# Altium PCB UWB-Adapter_Pcb.PcbDoc
Units mil, origin at the board's own origin, x right, y up, seen from the top; angles counter-clockwise.
Board outline 708.66 x 1771.65 mil, 2 copper layers (Top Layer, Bottom Layer), stack 49.606 mil thick; 46 components, 63 nets, 223 pads, 83 vias.
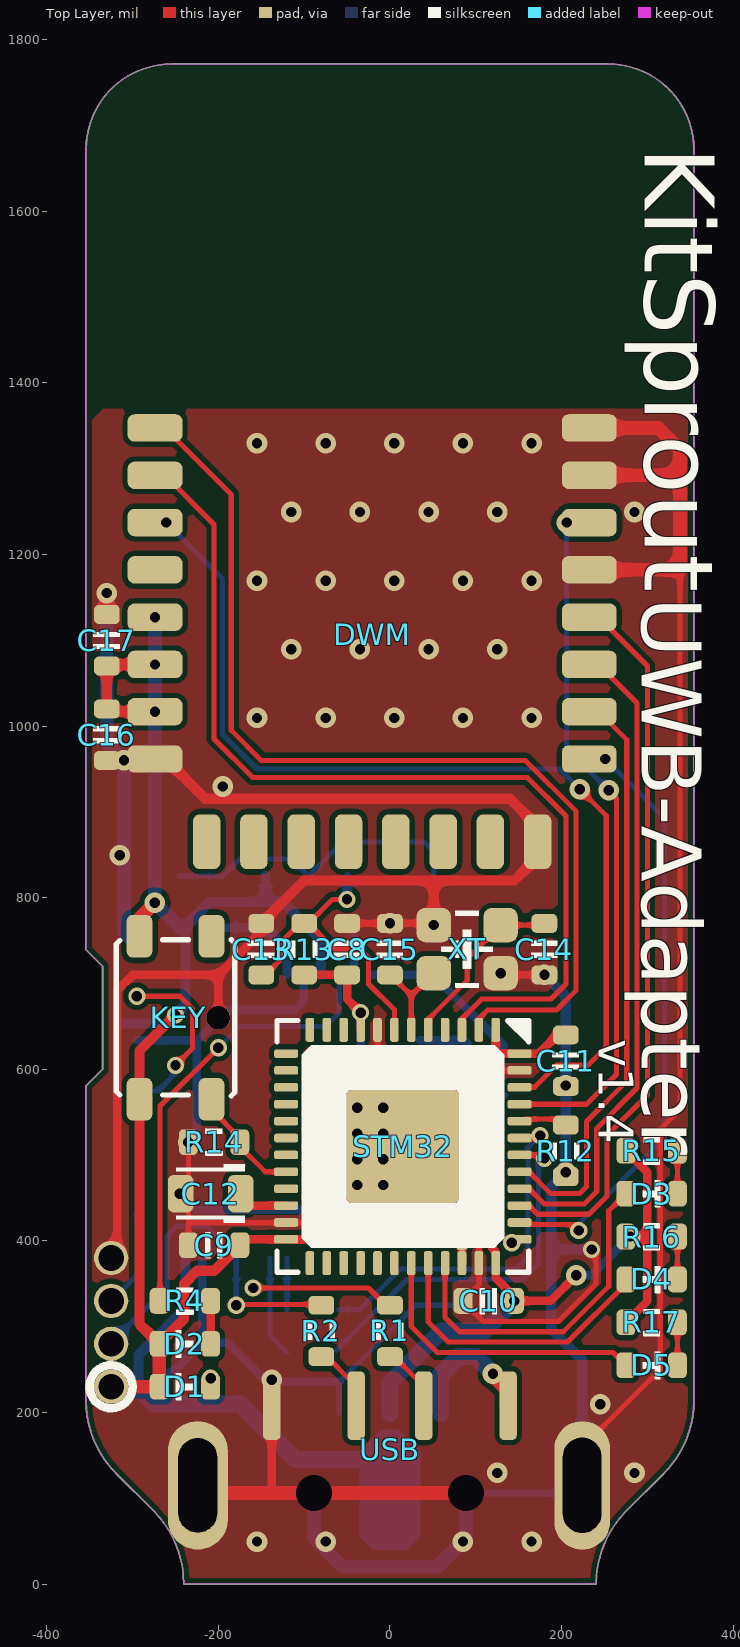
[diagram p0: Top Layer view]
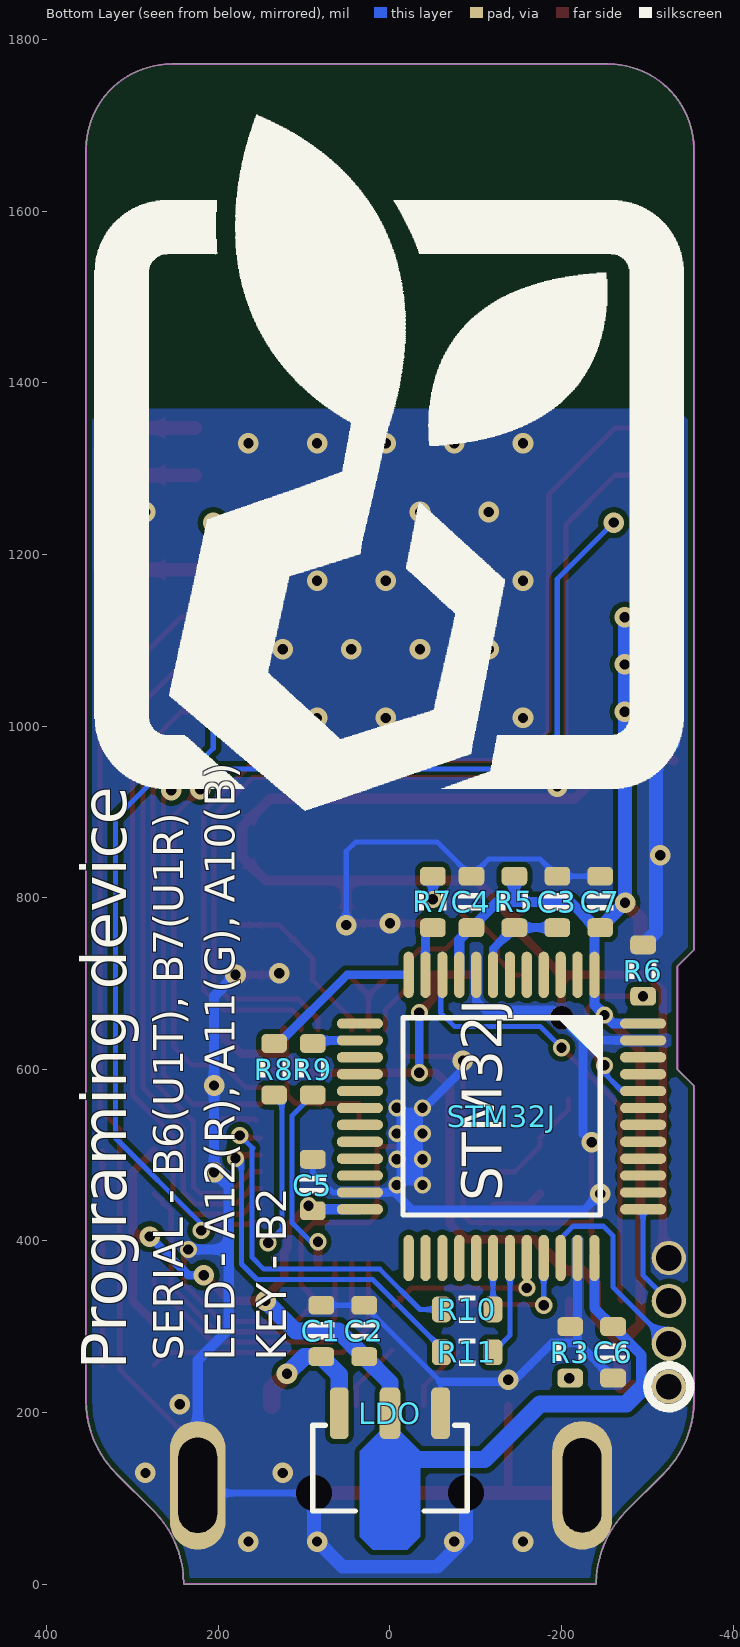
[diagram p1: Bottom Layer view, seen from below]
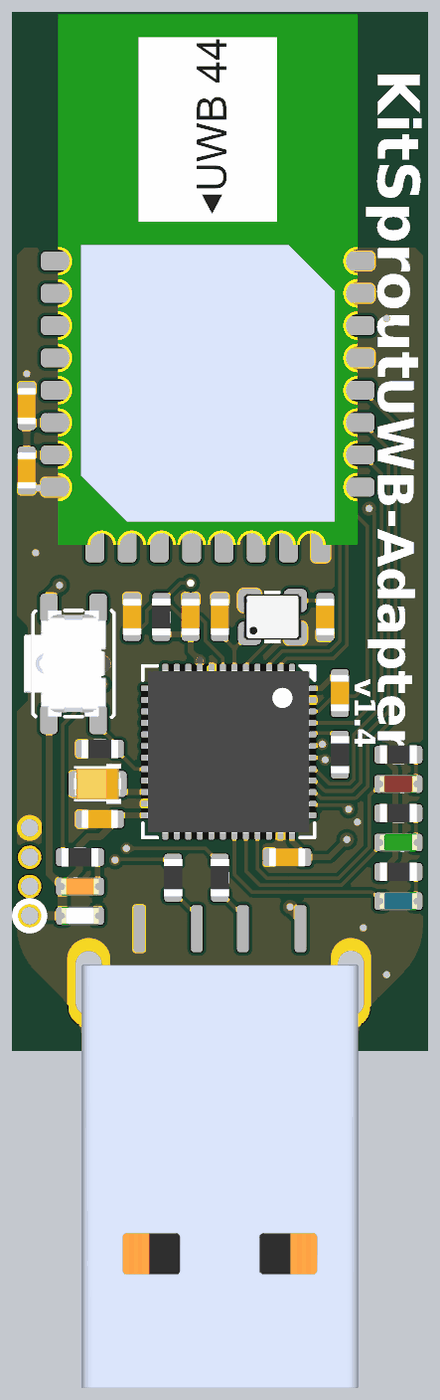
[diagram p2: 3D render of the assembled board from above, using the file's embedded part models]
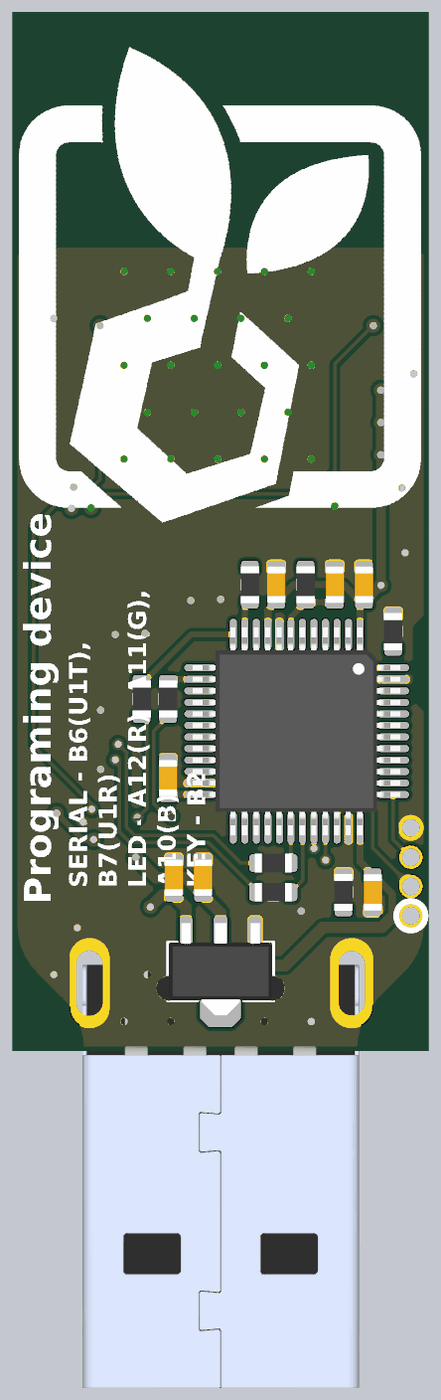
[diagram p3: 3D render of the assembled board from below, using the file's embedded part models]

## Layer stack, top to bottom
Top Solder: solder mask 0.3937, Solder Resist, Dk 3.5
Top Layer: signal copper 1.1811
Dielectric 1: core 47.2441, Dk 4.2
Bottom Layer: signal copper 1.1811
Bottom Solder: solder mask 0.3937, Solder Resist, Dk 3.5

## Board outline
-354.33,214.02 -354.33,580.67 -335,600 -335,720 -354.33,739.33 -354.33,1671.65 cw(c-254.33,1671.65) -254.33,1771.65 254.33,1771.65 cw(c254.33,1671.65) 354.33,1671.65 354.33,214.02 cw(c233.62,214.02) 318.98,128.66 275.67,85.36 ccw(c361.03,0) 240.31,0 -240.31,0 ccw(c-361.03,0) -275.67,85.36 -318.98,128.66 cw(c-233.62,214.02)

## Design rules (kind name [scope] priority, off if disabled: settings)
Clearance "Stitching GND" [IsStitchingVia and InNet('GND') vs (IsVia and (Not IsStitchingVia)) Or IsPad] p1: gap=6
Clearance ClearancePolygon [InPolygon] p2: gap=6
Clearance [All] p3: gap=6
ComponentClearance [All] p1: gap=0 collisioncheckmode=3 verticalgap=0 showdistances=FALSE
Height [All] p1: minheight=0 maxheight=5000 prefheight=500
HoleSize [All] p1: absolutevalues=TRUE maxlimit=200 minlimit=1 maxpercent=80.000 minpercent=20.000
HoleToHoleClearance [All] p1: gap=6 allowstackedmicrovias=TRUE
MinimumSolderMaskSliver [All] p1: minsoldermaskwidth=0
PolygonConnect [All] p1: connectstyle=Direct reliefconductorwidth=10 reliefentries=4 polygonreliefangle="90 Angle" airgapwidth=10
RoutingVias [All] p1: holewidth=12 width=24 viastyle="Through Hole" minholewidth=12 minwidth=16 maxholewidth=28 maxwidth=50
SilkToSilkClearance [All] p1: silktosilkclearance=0
SilkToSolderMaskClearance [IsPad] p1: minsilkscreentomaskgap=0 clearancetoexposedcopper=TRUE
SolderMaskExpansion [All] p1: expansion=2
Width [All] p1: maxlimit=50 minlimit=6 preferedwidth=10
23 further rules are at their usual default settings.

## Components (designator, comment, footprint, x,y, rotation, side; value= is the part's Value field where it differs from the comment)
C1 "Cap_0603" CAP_0603 80,295 r270 bottom
C2 "Cap_0603" CAP_0603 30,295 r270 bottom
C3 "Cap_0603" CAP_0603 -195,795 r270 bottom
C4 "Cap_0603" CAP_0603 -95,795 r270 bottom
C5 "Cap_0603" CAP_0603 90,465 r270 bottom
C6 "Cap_0603" CAP_0603 -260,270 r90 bottom
C7 "Cap_0603" CAP_0603 -245,795 r270 bottom
C8 "Cap_0603" CAP_0603 -50,740 r270 top
C9 "Cap_0603" CAP_0603 -205,395 r0 top
C10 "Cap_0603" CAP_0603 115,330 r0 top
C11 "Cap_0603" CAP_0603 205,610 r90 top
C12 "Cap_Tan_0805" CAP_TAN_P0805 -209,455 r180 top
C13 "Cap_0603" CAP_0603 -150,740 r270 top
C14 "Cap_0603" CAP_0603 180,740 r90 top
C15 "Cap_0603" CAP_0603 0,740 r270 top
C16 "Cap_0603" CAP_0603 -330,990 r270 top
C17 "Cap_0603" CAP_0603 -330,1100 r90 top
D1 "LED_0603" LED_0603_YELLOW -239,230 r0 top
D2 "LED_0603" LED_0603_ORANGE -239,280 r0 top
D3 "LED_0603" LED_0603_RED 305,455 r180 top
D4 "LED_0603" LED_0603_GREEN 305,355 r180 top
D5 "LED_0603" LED_0603_BLUE 305,255 r180 top
DWM "DWM1000" DWM1000 -20.75,863.15 r0 top locked
KEY "ButtonTACT" ButtonTACT_3.5*3.55_90 -250,660 r90 top locked
LDO "AMS1117" SOT89-3 0,135 r270 bottom
R1 "Res_0603" RES_0603 0,295 r90 top
R2 "Res_0603" RES_0603 -80,295 r90 top
R3 "Res_0603" RES_0603 -210,270 r270 bottom
R4 "Res_0603" RES_0603 -239,330 r0 top
R5 "Res_0603" RES_0603 -145,795 r90 bottom
R6 "Res_0603" RES_0603 -295,715 r270 bottom
R7 "Res_0603" RES_0603 -50,795 r270 bottom
R8 "Res_0603" RES_0603 135,600 r90 bottom
R9 "Res_0603" RES_0603 90,600 r90 bottom
R10 "Res_0603" RES_0603 -90,320 r180 bottom
R11 "Res_0603" RES_0603 -90,270 r180 bottom
R12 "Res_0603" RES_0603 205,505 r270 top
R13 "Res_0603" RES_0603 -100,740 r270 top
R14 "Res_0603" RES_0603 -205,515 r0 top
R15 "Res_0603" RES_0603 305,505 r180 top
R16 "Res_0603" RES_0603 305,405 r180 top
R17 "Res_0603" RES_0603 305,305 r180 top
STM32 "STM32F411C" QFN_P0.5_48 15,510 r270 top locked
STM32J "STM32F072C" LQFP_P0.5_48 -130,545 r270 bottom locked
USB "USB_Plug_TypeA" USB_Plug_TypeA 0,0 r270 top
XT "XTAL_2520_4P" XT_2520_4 90,740 r0 top

## Footprints (in the part's own frame and the unit in brackets; to place one, negate y for a bottom-side part, rotate by r counter-clockwise, add the part's x,y. Pads: shape width x height; smd on the part's side, far side on the other; paste and mask are expansions set on the pad)
ButtonTACT_3.5*3.55_90 [mil]
  round 27.56 hole 27.56 mask+0: 0(-0.01,-50)
  rrect50% 50x30 smd: 1(-95,42) 2(-95,-42) 3(95,42) 4(95,-42)
  silkscreen extent -91,-69 91,69, body extent -90,-55 91,85, height 56
CAP_0603 [mil]
  rrect50% 22x30 smd: 1(-30,0) 2(30,0)
  silkscreen extent -10,-15 10,15, body extent -31,-16 31,16, height 31
CAP_TAN_P0805 [mil]
  rrect50% 30x44 smd: 1(-35,0) 2(35,0)
  silkscreen extent -40,-34 40,34, body extent -40,-27 40,27, height 59
DWM1000 [mil]
  rrect50% 64x32 smd: 1(-253,484.25) 2(-253,429.13) 3(-253,374.02) 4(-253,318.9) 5(-253,263.78) 6(-253,208.66) 7(-253,153.54) 8(-253,98.43) 17(253,98.43) 18(253,153.54) 19(253,208.66) 20(253,263.78) 21(253,318.9) 22(253,374.02) 23(253,429.13) 24(253,484.25)
  rrect50% 32x64 smd: 9(-192.91,2) 10(-137.8,2) 11(-82.68,2) 12(-27.56,2) 13(27.56,2) 14(82.68,2) 15(137.8,2) 16(192.91,2)
  body extent -256,0 256,906, height 114
LED_0603_BLUE [mil]
  rrect50% 22x30 smd: 1(-30,0) 2(30,0)
  silkscreen extent -10,-16 10,16, body extent -32,-16 32,16, height 24
LED_0603_GREEN [mil]
  rrect50% 22x30 smd: 1(-30,0) 2(30,0)
  silkscreen extent -10,-16 10,16, body extent -32,-16 32,16, height 24
LED_0603_ORANGE [mil]
  rrect50% 22x30 smd: 1(-30,0) 2(30,0)
  silkscreen extent -10,-16 10,16, body extent -32,-16 32,16, height 24
LED_0603_RED [mil]
  rrect50% 22x30 smd: 1(-30,0) 2(30,0)
  silkscreen extent -10,-16 10,16, body extent -32,-16 32,16, height 24
LED_0603_YELLOW [mil]
  rrect50% 22x30 smd: 1(-30,0) 2(30,0)
  silkscreen extent -10,-16 10,16, body extent -32,-16 32,16, height 24
LQFP_P0.5_48 [mil]
  oval 54x12 smd: 1(-165,108.27) 2(-165,88.58) 3(-165,68.9) 4(-165,49.21) 5(-165,29.53) 6(-165,9.84) 7(-165,-9.84) 8(-165,-29.53) 9(-165,-49.21) 10(-165,-68.9) 11(-165,-88.58) 12(-165,-108.27) 25(165,-108.27) 26(165,-88.58) 27(165,-68.9) 28(165,-49.21) 29(165,-29.53) 30(165,-9.84) 31(165,9.84) 32(165,29.53) 33(165,49.21) 34(165,68.9) 35(165,88.58) 36(165,108.27)
  oval 12x54 smd: 13(-108.27,-165) 14(-88.58,-165) 15(-68.9,-165) 16(-49.21,-165) 17(-29.53,-165) 18(-9.84,-165) 19(9.84,-165) 20(29.53,-165) 21(49.21,-165) 22(68.9,-165) 23(88.58,-165) 24(108.27,-165) 37(108.27,165) 38(88.58,165) 39(68.9,165) 40(49.21,165) 41(29.53,165) 42(9.84,165) 43(-9.84,165) 44(-29.53,165) 45(-49.21,165) 46(-68.9,165) 47(-88.58,165) 48(-108.27,165)
  silkscreen extent -115,-115 115,115, body extent -177,-178 177,177, height 61
QFN_P0.5_48 [mil]
  rrect50% 28x10 smd: 1(-136,108.27) 2(-136,88.58) 3(-136,68.9) 4(-136,49.21) 5(-136,29.53) 6(-136,9.84) 7(-136,-9.84) 8(-136,-29.53) 9(-136,-49.21) 10(-136,-68.9) 11(-136,-88.58) 12(-136,-108.27) 25(136,-108.27) 26(136,-88.58) 27(136,-68.9) 28(136,-49.21) 29(136,-29.53) 30(136,-9.84) 31(136,9.84) 32(136,29.53) 33(136,49.21) 34(136,68.9) 35(136,88.58) 36(136,108.27)
  rrect50% 10x28 smd: 13(-108.27,-136) 14(-88.58,-136) 15(-68.9,-136) 16(-49.21,-136) 17(-29.53,-136) 18(-9.84,-136) 19(9.84,-136) 20(29.53,-136) 21(49.21,-136) 22(68.9,-136) 23(88.58,-136) 24(108.27,-136) 37(108.27,136) 38(88.58,136) 39(68.9,136) 40(49.21,136) 41(29.53,136) 42(9.84,136) 43(-9.84,136) 44(-29.53,136) 45(-49.21,136) 46(-68.9,136) 47(-88.58,136) 48(-108.27,136)
  rrect10% 132x132 smd: 49(0,0)
  silkscreen extent -147,-147 147,147, body extent -139,-139 139,139, height 22
RES_0603 [mil]
  rrect50% 22x30 smd: 1(-30,0) 2(30,0)
  silkscreen extent -10,-16 10,16, body extent -31,-16 31,16, height 18
SOT89-3 [mil]
  rrect50% 60x22 smd: 1(-64,59.06) 3(-64,-59.06)
  rrect50% 60x24 smd: 2(-64,0)
  Top Layer region: -45,10 -20,35 80,35 95,20 95,-20 80,-35 -20,-35 -45,-10
  silkscreen extent -50,-90 50,90, body extent -83,-88 75,88, height 60
USB_Plug_TypeA [mil]
  round 32 hole 42: 0(-106.3,88.58) 0(-106.3,-88.58)
  rrect50% 80x20 smd: 1(-208,137.8) 2(-208,39.37) 3(-208,-39.37) 4(-208,-137.8)
  oval 150x65 hole 45 slot 111 at 0 deg: 4(-115,224)
  oval 150x70 hole 45 slot 110 at 0 deg: 4(-115,-224)
  body extent -146,-236 576,236, height 70
XT_2520_4 [mil]
  rrect50% 40x40 smd: 1(39,28) 2(-39,28) 3(-39,-28) 4(39,-28)
  silkscreen extent -30,-44 30,44, body extent -49,-39 49,39, height 31

## Part data
C1 C2 C3 C4 C5 C6 C7 C8 C9 C10 C11 C12 C13 C14 C15 C16 C17: "Capacitor"
D1 D2 D3 D4 D5: "LED"
DWM: "Module"
KEY: "Button"
LDO: library part LDO1117, "Power"
R1 R2 R3 R4 R5 R6 R7 R8 R9 R10 R11 R12 R13 R14 R15 R16 R17: "Resistor"
STM32: library part STM32F4x1C, "MCU"
STM32J: library part STM32F103C, "MCU"
USB: "USB"
XT: "Crystal Oscillator"

## Free pads (board coordinates)
  round 40 hole 30: 1(-325,230) 2(-325,280) 3(-325,330) 4(-325,380)

## Via types
v1: diameter 24, hole 12, Top Layer to Bottom Layer, tented both sides, 58 vias
v2: diameter 20, hole 12, Top Layer to Bottom Layer, tented both sides, 25 vias

## Nets (pads, with @x,y where several pads share a name; then routed paths per layer and width w, separated by ;. In a path a pad name is that pad's centre, name@x,y a point inside that pad or via, vN(x,y) a via of type N, cw(c..) or ccw(c..) an arc to the next point about the centre after c; other vN are vias at no path point)
3V3: C2.2 C4.2 C5.2 C6.2 C7.2 C8.2 C9.2 C10.2 C11.2 C16.1 C17.1 D1.1 D2.1 DWM.5 DWM.6 DWM.7 KEY.1 KEY.3 LDO.2 pad.1 R5.2 R13.2 R15.2 R16.2 R17.2 STM32.1 STM32.9 STM32.24 STM32.36 STM32.48 STM32J.1 STM32J.9 STM32J.24 STM32J.36 STM32J.48 | length 3795.6
  Top Layer w10: C9.2 -168.27,401.73 STM32.24 -88.27,401.73 -70,420 -70,580 -54,596 v2(-34.21,596) 101,596 123.27,618.27 ; R13.2 C8.2 -50,681.79 v2(-34.21,666) STM32.9 ; v2(95,441) 119,417 119,391.67 121,389.67 121,389.03 123.27,386.77 STM32.36 123.27,356.73 150,330 187,330 v1(217,360) ; STM32.1 123.27,618.27 ; C11.2@195,640 173.27,618.27 STM32.48 123.27,618.27 ; R17.2 300,330 300,405 ; R16.2 v1(280,405) 300,405 ; R15.2 300,480 300,405
  Top Layer w12: DWM.7@-285.91,1016.69 -326.69,1016.69 C16.1 C17.1 -328.19,1071.81 DWM.6@-285.91,1071.81 ; v2(-250,663.27) -292,621.27 KEY.1 -292,303 D2.1 -240,309 -240,350 -225,365 -205,365 C9.2
  Top Layer w16: pad.1 D1.1 D2.1 ; KEY.3 -292,776 v1(-274,794)
  Bottom Layer w10: v2(-34.21,596) v2(-34.21,666) ; v1(217,360) 235,360 v1(280,405)
  Bottom Layer w12: STM32J.48@-313.27,653.27 STM32J.48 -260,653.27 v2(-250,663.27) -238.27,675 STM32J.1 -238.27,766.73 -210,795 -145,795 ; -293,227.49 -293,267 -265,295 C6.2@-255,295 ; C6.2 -238.27,321.73 STM32J.36 STM32J.36@-238.27,383.27 ; R5.2 -145,795 ; STM32J.9 -80.79,750.79 C4.2 -125,795 -145,795 ; STM32J.24 C5.2@78.27,436.73
  Bottom Layer w16: v1@-274,1015 v1(-274,794) C7.2 ; v1(-273.75,1016.69) v1(-273.75,1071.81) v1(-273.75,1126.93)
  Bottom Layer w20: pad.1 -295.51,230 ; -293,227.49 -275.51,210 -175,210 -110,145 -5,145 ; LDO.2 0,235 C2.2 60,295 110,295 v1(145,330)
BOOT: R12.1 STM32.44 | length 45.6
  Top Layer w6: STM32.44@156,540.49 157.51,542 R12.1@201,542
D_CS: DWM.17 STM32.38 | length 674.6
  Top Layer w6: STM32.38 161.58,421.42 164,419 v2@213,419
  Bottom Layer w6: v2@220,420 320,520 320,892.48 v1(250.91,961.57)
  other v2: 220,412
D_EXT: DWM.1 STM32.2 | length 1197.6
  Top Layer w6: DWM.1@-285.91,1347.4 DWM.1 -262.4,1347.4 -185,1270 -185,995 -150,960 157.73,960 217,900.73 217,692 194,669 114,669 103.58,658.58 STM32.2
D_IRQ: DWM.22 STM32.45 | length 794.6
  Top Layer w6: STM32.45 229.21,559.21 264,594 264,916 v1(255,925)
  Bottom Layer w6: v1(205.91,1237.17) 205.91,974.09 v1(255,925)
D_PHA: DWM.9
D_POL: DWM.10
D_RST: DWM.3 STM32.46 | length 1150.6
  Top Layer w6: STM32.46 168.39,578.9 194.49,605 231,605 252,626 252,895.43 v1(221.21,926.21)
  Bottom Layer w6: v1(-260.91,1237.17) -195,1171.26 -195,990 -155,950 197.43,950 v1(221.21,926.21)
D_SCK: DWM.20 STM32.39 | length 850
  Top Layer w6: STM32.39 161.9,441.1 172,431 232,431 253,452 253,523 300,570 300,1070 243.07,1126.93 DWM.20 DWM.20@225.91,1126.93
D_SDI: DWM.18 STM32.41 | length 696
  Top Layer w6: STM32.41 161.9,480.47 187.37,455 221,455 229,463 229,539 276,586 276,984 243.31,1016.69 DWM.18 DWM.18@225.91,1016.69
D_SDO: DWM.19 STM32.40 | length 773
  Top Layer w6: STM32.40 161.9,460.79 179.69,443 226.51,443 241,457.49 241,531 288,578 288,1027 243.19,1071.81 DWM.19 DWM.19@225.91,1071.81
D_WAK: DWM.2 STM32.3 | length 1148.2
  Top Layer w6: DWM.2@-285.91,1292.28 DWM.2 -262.28,1292.28 -205,1235 -205,985 -160,940 160,940 205,895 205,699.49 187.51,682 107,682 83.9,658.9 STM32.3
GND: C1.1 C2.1 C3.1 C4.1 C5.1 C6.1 C7.1 C8.1 C9.1 C10.1 C11.1 C12.2 C13.1 C14.1 C15.1 C16.2 C17.2 DWM.8 DWM.16 DWM.21 DWM.23 DWM.24 KEY.0 LDO.1 pad.4 R3.1 R6.1 R12.2 R14.1 STM32.8 STM32.23 STM32.35 STM32.47 STM32.49 STM32J.8 STM32J.23 STM32J.35 STM32J.47 USB.0 USB.4 XT.2 XT.4 | length 8403.6
  Top Layer w6: C9.1 -235,421 ; v1(-235,515) -235,421 ; STM32.23@-116,421 STM32.23@-121,421 ; v1(-85,610) -85,430 -93.58,421.42 STM32.23 STM32.23@-121,421 ; v1@-80,610 -75,615 -20,615 -14.53,620.47 STM32.8 ; STM32.49@-25,470 STM32.49@-25,510 ; STM32.49@-25,550 STM32.49@-25,510 ; STM32.49@36,531 36,560 110,560 120,570 120,590 128.58,598.58 STM32.47 ; USB.4@224,115 224,159 315,250 315,530 338,553 338,1182.05 ; v2@240,385 240,350 196,306 109,306 C10.1 103.58,348.58 STM32.35 103.58,406.42 89,421 24,421 15,430 STM32.49 STM32.49@-25,510 ; -235,421 STM32.23@-121,421
  Top Layer w8: C8.1 v1(0,770) 49,770 v1(51,768) ; v1(129,712) 131,710 v1(180,710)
  Top Layer w10: pad.4 -318,387 -318,691.7 -299.7,710 -200,710 ; KEY.0 -200,710 ; C13.1@-145,765 -200,710 ; -140,106 -137.8,108.2 USB.4@-137.8,208
  Top Layer w12: C16.2 -328.43,961.57 DWM.8 -261.57,961.57 -215.15,915.15 -85.15,915.15 -85,915 -84.85,915.15 139.85,915.15 172.17,882.83 DWM.16 172.17,847.17 145,820 51,820 ; C13.1 -100,820 51,820 ; v1(51,768) 51,820
  Top Layer w16: C17.2 v1(-330,1155) ; USB.4@-224,106 -140,106 USB.0@88.58,106 ; DWM.21@227.25,1182.05 DWM.21 338,1182.05 338,1292.28 ; DWM.23@227.25,1292.28 DWM.23 338,1292.28 ; DWM.24@227.25,1347.4 DWM.24 312.6,1347.4 338,1322 338,1292.28
  Bottom Layer w6: C7.1 C3.1 -175,845 -115,845 C4.1 -55,865 40,865 51,854 v1(51,768) ; LDO.1 -59.06,235.44 -58.49,236 30,324.49 C2.1 C1.1 ; STM32J.23 66.42,456.42 90,480 C5.1 C5.1@90,501
  Bottom Layer w8: USB.0@88.58,106 USB.4@224,106
  Bottom Layer w10: STM32J.47 -225,633.58 ; C6.1 -218.58,281.42 ; v1@-239,449 -226,436 -26,436 -5.58,456.42 STM32J.23 ; v1(-235,515) -225,525 -225,633.58 ; STM32J.35 -218.58,281.42 ; STM32J.8 -100.47,679.53 -111,669 -189.58,669 -225,633.58 ; v1(-85,610) -85,600 v2@-37,552 ; -58.49,236 -144,236 -189.42,281.42 -218.58,281.42
  Bottom Layer w12: v1(180,710) 205,685 v1(205,581) v1(205,480) 188,463 188,390 ; USB.4@224,106 224,115 224,261 188,297 188,390 ; v2(235,390) 188,390
  Bottom Layer w16: v1(-330,1155) -330,980 v1(-310,960) -310,760 R6.1 ; USB.0@-88.58,106.3 -88.58,53.58 -55,20 55,20 88.58,53.58 88.58,106 USB.0@88.58,106.3
  other v1: -155,49.49 -75,49.49 85,49.49 165,49.49 125,129.49 285,129.49 245,209.49 -137.8,238 -245,455 -315,849.49 -195,929.49 -155,1009.49 -75,1009.49 5,1009.49 85,1009.49 165,1009.49 -115,1089.49 -35,1089.49 45,1089.49 125,1089.49 -155,1169.49 -75,1169.49 5,1169.49 85,1169.49 165,1169.49 -115,1249.49 -35,1249.49 45,1249.49 125,1249.49 285,1249.49 -155,1329.49 -75,1329.49 5,1329.49 85,1329.49 165,1329.49
  other v2: -38,465 -8,465 -38,495 -8,495 -38,525 -8,525 -38,555 -8,555
ISWCLK: pad.3 STM32J.37 | length 119.2
  Bottom Layer w6: pad.3 -295,360 STM32J.37
ISWDIO: pad.2 STM32J.34 | length 246.1
  Bottom Layer w6: pad.2@-325,281 -260,346 -260,406 -249,417 -213.37,417 -198.9,402.53 STM32J.34
JBOOT: R6.2 STM32J.44 | length 205.6
  Top Layer w6: v2(-295,685) -244.86,685 -230,670.14 -230,624.53 v2(-250,604.53)
  Bottom Layer w6: STM32J.44 -270.47,574.53 v2@-245,600
JRST: C13.2 R7.1 R13.1 STM32.7 | length 353.2
  Top Layer w6: C13.2 -145,710 -125,730 -125,750 R13.1@-105,770 ; R13.1 R13.1@-95,770 ; v2(-50,798) -67,798 R13.1@-95,770 ; STM32.7 5.16,669.34 -25,699.49 -25,730 -35,740 -65,740 R13.1@-95,770
  Bottom Layer w10: v2(-50,798) R7.1
JRX: R11.1 STM32.42 | length 429.8
  Top Layer w6: STM32.42 176,500.16 v2(180,496.16)
  Bottom Layer w6: R11.1@-62.5,272.5 20,355 155,355 173,373 v2@173,495
JSC: R8.1 STM32.37 | length 183
  Bottom Layer w6: R8.1 126,561 126,413.73 v2(142,397.73) ; v2@139.81,400.19 v2@140.19,400.19
JSD: R9.1 STM32.34 | length 222.5
  Top Layer w10: STM32.34 v2(83.9,399)
  Bottom Layer w6: v2@84.45,399.45 92.58,399.45 114,420.87 114,546 R9.1
JTX: R10.1 STM32.43 | length 419.6
  Top Layer w6: STM32.43 v2@172,519.84
  Top Layer w8: v2@172,519.84 v2(175,522.84)
  Bottom Layer w6: R10.1 -35,320 12,367 147,367 161,381 161,507.84 ; 160,507.84 v2(175,522.84)
KEY: KEY.2 R14.2 STM32.20 | length 129.9
  Top Layer w6: KEY.2 -208,553 R14.2@-175,520 ; R14.2 -175,510 -145.47,480.47 STM32.20
LED: R4.1 STM32J.10 | length 525.9
  Top Layer w6: R4.1@-270,330 -268,332 -268,557 v2(-200,625)
  Bottom Layer w6: v2(-200,625) -175,650 -75,650 -59.1,665.9 STM32J.10@-59.1,710
LED_B: D5.2 STM32.31 | length 342.7
  Top Layer w6: STM32.31 24.84,300.16 55,270 260,270 D5.2
LED_G: D4.2 STM32.32 | length 341.9
  Top Layer w6: STM32.32 44.53,305.47 68,282 207,282 275,350 D4.2
LED_R: D3.2 STM32.33 | length 399.2
  Top Layer w6: STM32.33 64.21,310.79 81,294 202.03,294 255,346.97 255,435 D3.2
NetD1_2: D1.2 R3.2
  other v2: -209,240
NetD2_2: D2.2 R4.2 | length 50
  Top Layer w10: D2.2 R4.2
NetD3_1: D3.1 R15.1 | length 50
  Top Layer w6: D3.1 R15.1
NetD4_1: D4.1 R16.1 | length 50
  Top Layer w6: D4.1 R16.1
NetD5_1: D5.1 R17.1 | length 50
  Top Layer w6: D5.1 R17.1
NetR1_1: R1.1 USB.2 | length 81.8
  Top Layer w6: R1.1@-2.5,272.5 39.37,230.63 USB.2
NetR2_1: R2.1 USB.3 | length 79.2
  Top Layer w6: R2.1@-79.37,270.63 -39.37,230.63 USB.3
NetR7_2: R7.2 STM32J.11 | length 58.6
  Bottom Layer w10: R7.2 -41.42,756.42 STM32J.11
NetR8_2: R8.2 STM32J.12 | length 188.4
  Bottom Layer w10: STM32J.12 50,710 R8.2@132.5,627.5
NetR9_2: R9.2 STM32J.14 | length 56.5
  Bottom Layer w10: STM32J.14 86.42,633.58 R9.2
NetR10_2: R10.2 STM32J.30 | length 60.1
  Bottom Layer w6: STM32J.30 -120.16,320.16 R10.2
NetR11_2: R11.2 STM32J.31 | length 118.3
  Bottom Layer w6: STM32J.31 -140,379.84 -140,290 R11.2
PA0: STM32.10
PA1: STM32.11
PA2: STM32.12
PA3: STM32.13
PA4: STM32.14
PA5: STM32.15
PA6: STM32.16
PA7: STM32.17
PA8: STM32.29
PA9: STM32.30
PB0: STM32.18
PB1: STM32.19
PB\10: STM32.21
PB\12: STM32.25
PB\13: STM32.26
PB\14: STM32.27
PB\15: STM32.28
PC15: STM32.4
RST: C3.2 R5.1 STM32J.7 | length 115.3
  Bottom Layer w10: C3.2 R5.1 -120.16,740.16 STM32J.7
USB_DM: R1.2 STM32J.32 | length 162.8
  Top Layer w6: v2(-159.53,345) -25,345 R1.2@-5,325
USB_DP: R2.2 STM32J.33 | length 156.3
  Top Layer w6: v2(-179.21,325) -178.21,326 -84,326 R2.2@-80,330
  Bottom Layer w6: v2(-179.21,325) STM32J.33
VCAP: C12.1 STM32.22 | length 59.8
  Top Layer w10: C12.1@-175,455 -161.1,441.1 STM32.22
VUSB: C1.2 LDO.3 USB.1 | length 167.3
  Top Layer w20: v1(120,245) 137.8,227.2 USB.1
  Bottom Layer w20: LDO.3 59.06,244.06 C1.2 100,265 v1(120,245)
XT_I: C14.2 STM32.5 XT.1 | length 208.8
  Top Layer w6: STM32.5 44.53,658.28 90,703.75 90,729 XT.1 178,768 C14.2
XT_O: C15.2 STM32.6 XT.3 | length 111.7
  Top Layer w6: C15.2 0.69,710 24.84,685.84 ; STM32.6 24.84,685.84 ; XT.3 24.84,685.84
pads on no net: DWM.4 DWM.11 DWM.12 DWM.13 DWM.14 DWM.15 KEY.4 STM32J.2 STM32J.3 STM32J.4 STM32J.5 STM32J.6 STM32J.13 STM32J.15 STM32J.16 STM32J.17 STM32J.18 STM32J.19 STM32J.20 STM32J.21 STM32J.22 STM32J.25 STM32J.26 STM32J.27 STM32J.28 STM32J.29 STM32J.38 STM32J.39 STM32J.40 STM32J.41 STM32J.42 STM32J.43 STM32J.45 STM32J.46

## Polygon pours and split planes (outlines as drawn)
no net on Keep-Out Layer "NONET_L-01_P-001" (none, remove dead copper): -354.33,214.02 -354.33,580.67 -335,600 -335,720 -354.33,739.33 -354.33,1671.65 cw(c-254.33,1671.65) -254.33,1771.65 254.33,1771.65 cw(c254.33,1671.65) 354.33,1671.65 354.33,214.02 cw(c233.62,214.02) 318.98,128.66 275.67,85.36 ccw(c361.03,0) 240.31,0 -240.31,0 ccw(c-361.03,0) -275.67,85.36 -318.98,128.66 cw(c-233.62,214.02)
GND on Top Layer "GND_L01_P001" (solid, remove dead copper, pour order 1): -354.33,214.02 -354.33,580.67 -335,600 -335,720 -354.33,739.33 -354.33,1671.65 cw(c-254.33,1671.65) -254.33,1771.65 254.33,1771.65 cw(c254.33,1671.65) 354.33,1671.65 354.33,214.02 cw(c233.62,214.02) 318.98,128.66 275.67,85.36 ccw(c361.03,0) 240.31,0 -240.31,0 ccw(c-361.03,0) -275.67,85.36 -318.98,128.66 cw(c-233.62,214.02)
GND on Bottom Layer "GND_L02_P000" (solid, remove dead copper, pour order 0): -354.33,214.02 -354.33,580.67 -335,600 -335,720 -354.33,739.33 -354.33,1671.65 cw(c-254.33,1671.65) -254.33,1771.65 254.33,1771.65 cw(c254.33,1671.65) 354.33,1671.65 354.33,214.02 cw(c233.62,214.02) 318.98,128.66 275.67,85.36 ccw(c361.03,0) 240.31,0 -240.31,0 ccw(c-361.03,0) -275.67,85.36 -318.98,128.66 cw(c-233.62,214.02)

## Other copper
Bottom Layer:
  region net GND: -8,555 -38,555 -38,465 -8,465
Multi-Layer:
  pour cut-out: -354.33,1350 -334.33,1370 334.33,1370 354.33,1350 354.33,1671.65 ccw(c254.33,1671.65) 254.33,1771.65 -254.33,1771.65 ccw(c-254.33,1671.65) -354.33,1671.65

## Silkscreen, mask and mechanical layers (free items; w line width, h text height)
Top Overlay:
  circle w10: c-325,230 r25
  text "KitSprout" at 270,1675 h140 r270
  text "UWB-Adapter" at 270,1150 h120 r270
  text "v1.4" at 230,635 h70 r270
Bottom Overlay:
  drawing of 3460 lines, arcs and shapes, not listed
  text "STM32J" at -146,446 h80 r270
  text "SERIAL - B6(U1T), B7(U1R) / LED - A12(R), A11(G), A10(B) / KEY - B2" at 109,260 h60 r270
  text "Programing device" at 290,250 h90 r270
Mechanical 1:
  the board outline again, w2

## Dimensions
-354.33,1671.65 to 354.33,1671.65 on Mechanical 13
254.33,1771.65 to 240.31,0 on Mechanical 13